# Altium PCB Radar.PcbDoc (part 2 of 3)
Units mil, origin at the board's own origin, x right, y up, seen from the top; angles counter-clockwise.
Board outline 2145 x 1580 mil, 4 copper layers (Layer 1, Layer 2, Layer 3, Layer 4), stack 61.58 mil thick; 62 components, 38 nets, 226 pads, 53 vias.
Unrouted connection lines stored in the file: 17.
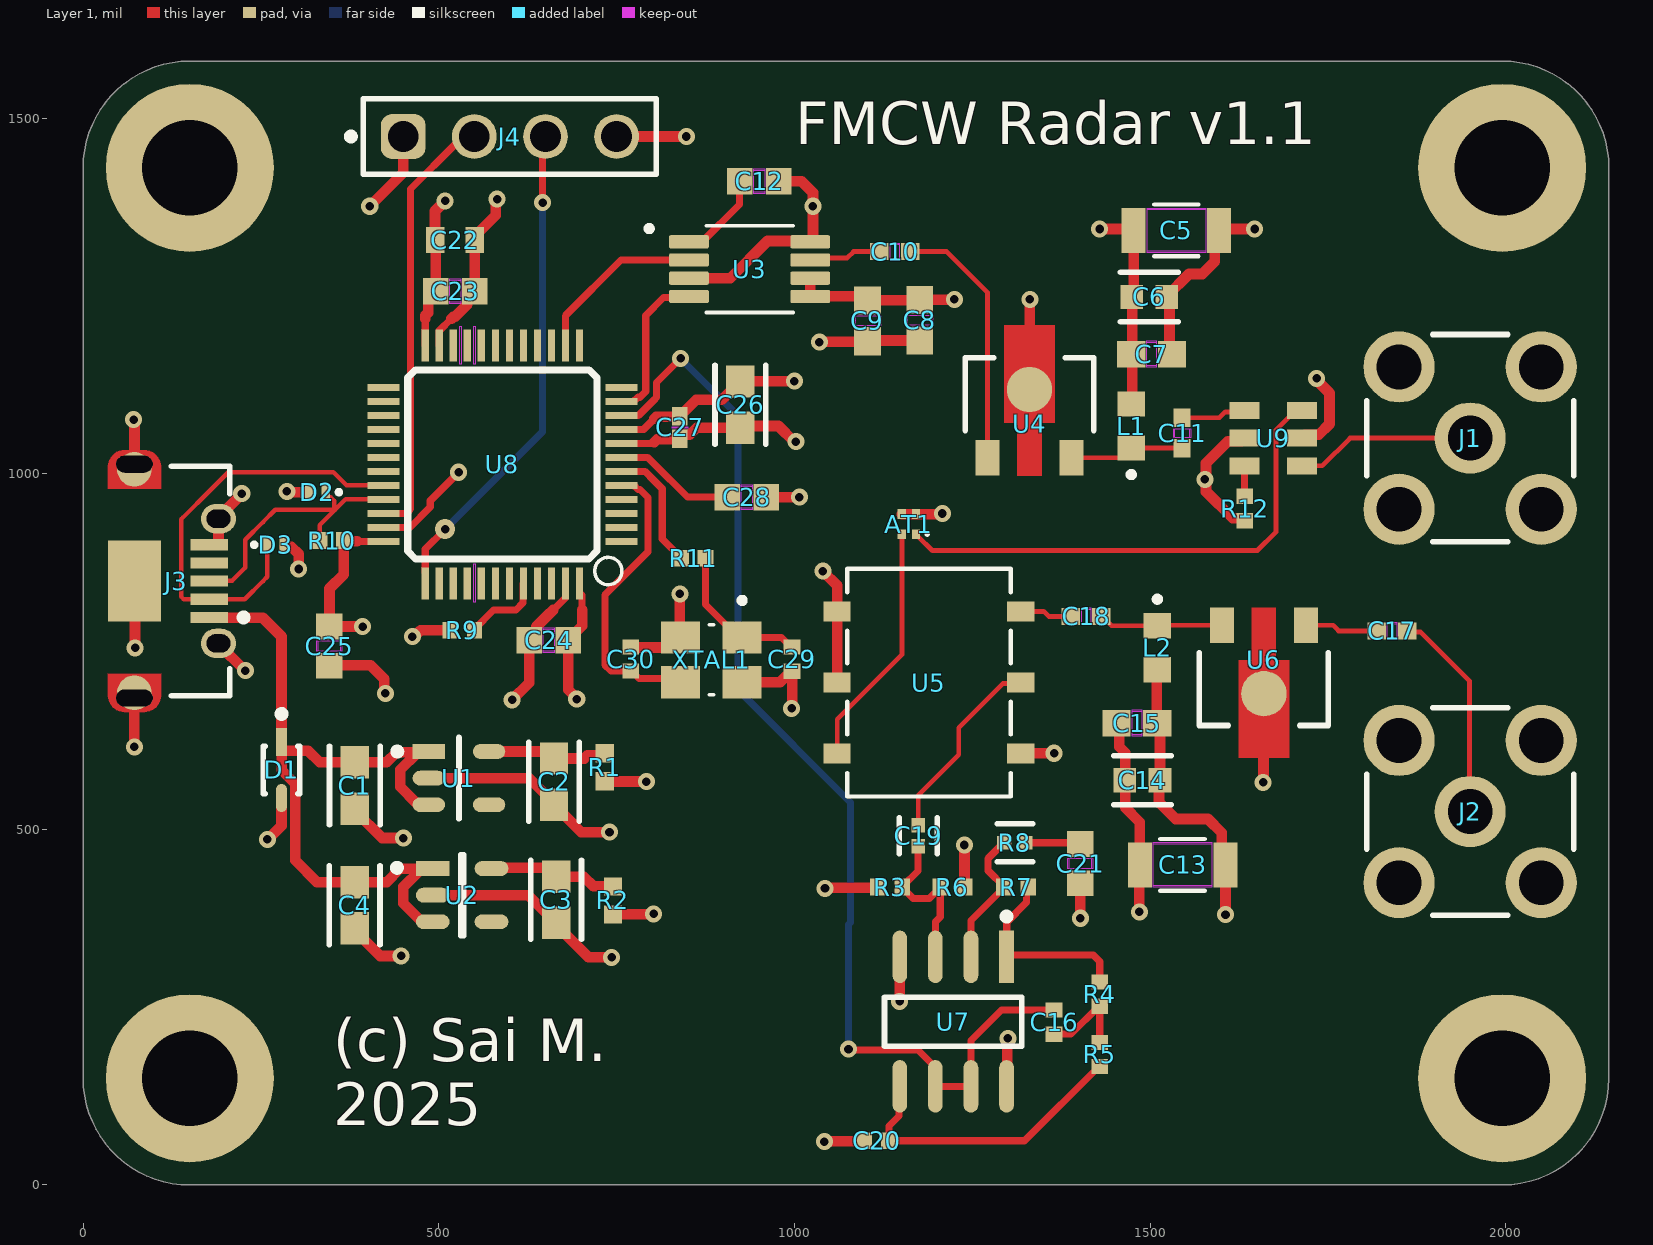
[diagram p0: Layer 1 view]

## Part data (continued)
C22: library part CL10A475KP8NNNC, "Ceramic Capacitor, Multilayer, Ceramic, 10V, 10% +Tol, 10% -Tol, X5R, 15% TC, 4.7uF, Surface Mount, 0603", Capacitor Type=Ceramic, Case/Package=0603, Manufacturer=Samsung, Max Operating Temperature=85°C, Min Operating Temperature=-55°C, Package Shape=Rectangular, Package Style=SMTMeter, Rated DC Voltage (URdc)=10V, Supplier Part Number=1276-1044-1-ND, Temperature Characteristics Code=X5R, Tolerance  (fill in as +-)=10%, Category="Ceramic Capacitors", ComponentLink1Description=https://datasheet.ciiva.com:443/pdfs/VipMasterIC/IC/SEMS/SEMS-S-A0008521003/SEMS-S-A0008520862-1.pdf?src-supplier=IHS+Markit, ComponentLink1URL=https://datasheet.ciiva.com:443/pdfs/VipMasterIC/IC/SEMS/SEMS-S-A0008521003/SEMS-S-A0008520862-1.pdf?src-supplier=IHS+Markit, ComponentLink2Description=https://datasheet.ciiva.com/25797/cl10a475kp8nnnc-25797520.pdf?src-supplier=Digikey, ComponentLink2URL=https://datasheet.ciiva.com/25797/cl10a475kp8nnnc-25797520.pdf?src-supplier=Digikey, ComponentLink3Description=https://datasheet.ciiva.com/26838/getdatasheetpartid-358676-26838384.pdf?src-supplier=Verical, ComponentLink3URL=https://datasheet.ciiva.com/26838/getdatasheetpartid-358676-26838384.pdf?src-supplier=Verical, ComponentLink4Description=https://datasheet.ciiva.com/16318/cl05b104kq5nnnc-16318245.pdf?src-supplier=Future+Electronics, ComponentLink4URL=https://datasheet.ciiva.com/16318/cl05b104kq5nnnc-16318245.pdf?src-supplier=Future+Electronics, Dielectric Material=Ceramic, Height=0.5mm, JESD-609 Code=e3, Length=1.6mm, Manufacturer Part Number=CL10A475KP8NNNC, Mounting Technology="Surface Mount", Multilayer=Yes, Packaging="Tape and Reel", Pins=2, Pricing="1=0.08, 10=0.01, 100=0.008, 1000=0.0064 (USD)", Reach SVHC Compliant=Yes, RoHS=Yes, RoHS Compliant=Yes, Stock=5168989, Supplier=Digikey, Terminal Finish=Nickel, Termination=Wraparound, Tolerance (fill in as +-)=10%, Width=0.8mm
C27: library part C0402C103K5RACTU, "Ceramic Capacitor, Multilayer, Ceramic, 50V, 10% +Tol, 10% -Tol, X7R, 15% TC, 0.01uF, Surface Mount, 0402", Capacitor Type=Ceramic, Case/Package=0402, Manufacturer=KEMET, Max Operating Temperature=125°C, Min Operating Temperature=-55°C, Package Shape=Rectangular, Package Style=SMTMeter, Rated DC Voltage (URdc)=50V, Supplier Part Number=399-C0402C103K5RACTUDKR-ND, Temperature Characteristics Code=X7R, Tolerance  (fill in as +-)=10%, Category="Ceramic Capacitors", ComponentLink1Description=https://datasheet.ciiva.com:443/pdfs/VipMasterIC/IC/KEME/KEME-S-A0008991654/KEME-S-A0008991654-1.pdf?src-supplier=IHS+Markit, ComponentLink1URL=https://datasheet.ciiva.com:443/pdfs/VipMasterIC/IC/KEME/KEME-S-A0008991654/KEME-S-A0008991654-1.pdf?src-supplier=IHS+Markit, ComponentLink2Description=https://datasheet.ciiva.com/45846/docfinderpartnumberc0402c102k5ractu-45846918.pdf?src-supplier=Onlinecomponents.com, ComponentLink2URL=https://datasheet.ciiva.com/45846/docfinderpartnumberc0402c102k5ractu-45846918.pdf?src-supplier=Onlinecomponents.com, Dielectric Material=Ceramic, Height=0.5mm, JESD-609 Code=e3, Length=1mm, Manufacturer Part Number=C0402C103K5RACTU, Mounting Technology="Surface Mount", Multilayer=Yes, Packaging="Tape and Reel", Pins=2, Pricing="1=0.08, 10=0.005, 100=0.0043 (USD)", Reach SVHC Compliant=Yes, RoHS=Yes, RoHS Compliant=Yes, Stock=862179, Supplier=Digikey, Terminal Finish=Nickel, Termination=Wraparound, Tolerance (fill in as +-)=10%, Width=0.5mm
C29 C30: library part GJM1555C1H8R0BB01D, "Ceramic Capacitor, Multilayer, Ceramic, 50V, 1.25% +Tol, 1.25% -Tol, C0G, 30ppm/Cel TC, 0.000008uF, Surface Mount, 0402", Capacitor Type=Ceramic, Case/Package=0402, Manufacturer=Murata, Max Operating Temperature=125°C, Min Operating Temperature=-55°C, Package Shape=Rectangular, Package Style=SMTMeter, Rated DC Voltage (URdc)=50V, Supplier Part Number=490-11238-1-ND, Temperature Characteristics Code=C0G, Tolerance  (fill in as +-)=1.25%, Category="Ceramic Capacitors", ComponentLink1Description=https://datasheet.ciiva.com:443/pdfs/VipMasterIC/IC/MURE/MURE-S-A0004378008/MURE-S-A0004383112-1.pdf?src-supplier=IHS+Markit, ComponentLink1URL=https://datasheet.ciiva.com:443/pdfs/VipMasterIC/IC/MURE/MURE-S-A0004378008/MURE-S-A0004383112-1.pdf?src-supplier=IHS+Markit, ComponentLink2Description=https://datasheet.ciiva.com/11610/product-11610188.pdf?src-supplier=Avnet, ComponentLink2URL=https://datasheet.ciiva.com/11610/product-11610188.pdf?src-supplier=Avnet, Dielectric Material=Ceramic, Height=0.5mm, JESD-609 Code=e3, Length=1mm, Manufacturer Part Number=GJM1555C1H8R0BB01D, Mounting Technology="Surface Mount", Multilayer=Yes, Packaging="Tape and Reel", Pins=2, Pricing="1=0.1, 10=0.052, 100=0.0307, 1000=0.01991 (USD)", Reach SVHC Compliant=Yes, RoHS=Yes, RoHS Compliant=Yes, Stock=33111, Supplier=Digikey, Terminal Finish=Nickel, Termination=Wraparound, Tolerance (fill in as +-)=1.25%, Width=0.5mm
D1: "Trans Voltage Suppressor Diode, 130W, 5V V(RWM), Bidirectional, 2 Element, Silicon", Breakdown Voltage-Nom=7.5V, Clamping Voltage-Max=14V, Manufacturer="Diodes Zetex", Max Breakdown Voltage=9.5V, Max Operating Temperature=150°C, Max Power Dissipation=200mW, Min Breakdown Voltage=5.5V, Min Operating Temperature=-65°C, Non-rep Peak Rev Power Dis-Max=130W, Package Body Material=Plastic, Package Shape=Rectangular, Package Style="SMALL OUTLINEMeter", Peak Reflow Temperature (Cel)=260°C, Rep Pk Reverse Voltage-Max=5V, Supplier Part Number=DESD5V0S1BA-7DICT-ND, Time @ Peak Reflow Temperature-Max (s)=40s, Category="TVS Diodes", ComponentLink1Description=https://datasheet.ciiva.com:443/pdfs/VipMasterIC/IC/DIOD/DIODS15480/DIODS15480-1.pdf?src-supplier=IHS+Markit, ComponentLink1URL=https://datasheet.ciiva.com:443/pdfs/VipMasterIC/IC/DIOD/DIODS15480/DIODS15480-1.pdf?src-supplier=IHS+Markit, ComponentLink2Description=https://datasheet.ciiva.com/6574/ds31275-6574481.pdf?src-supplier=Digikey, ComponentLink2URL=https://datasheet.ciiva.com/6574/ds31275-6574481.pdf?src-supplier=Digikey, ComponentLink3Description=https://datasheet.ciiva.com/13078/ds31275-219185-13078529.pdf?src-supplier=Mouser, ComponentLink3URL=https://datasheet.ciiva.com/13078/ds31275-219185-13078529.pdf?src-supplier=Mouser, ComponentLink4Description=https://datasheet.ciiva.com/30478/0900766b8115c371-30478883.pdf?src-supplier=Rs, ComponentLink4URL=https://datasheet.ciiva.com/30478/0900766b8115c371-30478883.pdf?src-supplier=Rs, ComponentLink5Description=https://datasheet.ciiva.com/15186/getdatasheetpartid-662239-15186712.pdf?src-supplier=Verical, ComponentLink5URL=https://datasheet.ciiva.com/15186/getdatasheetpartid-662239-15186712.pdf?src-supplier=Verical, Diode Element Material=SILICON, Diode Type="TRANS VOLTAGE SUPPRESSOR", JESD-30 Code=R-PDSO-G2, JESD-609 Code=e3, Manufacturer Part Number=DESD5V0S1BA-7, Moisture Sensitivity Level=1, Number of Elements=2, Pins=2, Polarity=Bidirectional, Pricing="1=0.1, 10=0.066, 100=0.05 (USD)", Reach SVHC Compliant=Yes, Reference Standard=IEC-61000-4-5, RoHS=Yes, RoHS Compliant=Yes, Stock=799643, Supplier=Digikey, Surface Mount=Yes, Technology=AVALANCHE, Terminal Finish=Tin, Terminal Form="Gull Wing", Terminal Position=DUAL
D2 D3: "Trans Voltage Suppressor Diode, 35W, 3.3V V(RWM), Bidirectional, 1 Element, Silicon", Manufacturer=Diodes, Supplier Part Number=31-DESD3V3E1BL-7BCT-ND, Category="TVS Diodes", ComponentLink1Description=https://datasheet.ciiva.com:443/pdfs/VipMasterIC/IC/DIOD/DIOD-S-A0007810551/DIOD-S-A0007810551-1.pdf?src-supplier=IHS+Markit, ComponentLink1URL=https://datasheet.ciiva.com:443/pdfs/VipMasterIC/IC/DIOD/DIOD-S-A0007810551/DIOD-S-A0007810551-1.pdf?src-supplier=IHS+Markit, ComponentLink2Description=https://datasheet.octopart.com/DESD3V3E1BL-7B-Diodes-Inc.-datasheet-151210080.pdf?src-supplier=Farnell, ComponentLink2URL=https://datasheet.octopart.com/DESD3V3E1BL-7B-Diodes-Inc.-datasheet-151210080.pdf?src-supplier=Farnell, ComponentLink3Description=https://datasheet.octopart.com/DESD3V3E1BL-7B-Diodes-Inc.-datasheet-151210080.pdf?src-supplier=Newark, ComponentLink3URL=https://datasheet.octopart.com/DESD3V3E1BL-7B-Diodes-Inc.-datasheet-151210080.pdf?src-supplier=Newark, ComponentLink4Description=https://www.diodes.com/assets/Datasheets/DESD3V3E1BL.pdf?src-supplier=Digikey, ComponentLink4URL=https://www.diodes.com/assets/Datasheets/DESD3V3E1BL.pdf?src-supplier=Digikey, Manufacturer Part Number=DESD3V3E1BL-7B, Pricing="1=0.12, 10=0.083, 100=0.034, 500=0.033, 1000=0.031, 2000=0.0305, 5000=0.03 (USD)", RoHS=Yes, Stock=131192, Supplier=Digikey
J1 J2: "RF SMA Connector", Manufacturer=Linx, Supplier Part Number=CONREVSMA002-ND, Category="RF / Coaxial Connectors", ComponentLink1Description=https://datasheet.ciiva.com:443/pdfs/VipMasterIC/IC/LNNC/LNNC-S-A0004850234/LNNC-S-A0004850234-1.pdf?src-supplier=IHS+Markit, ComponentLink1URL=https://datasheet.ciiva.com:443/pdfs/VipMasterIC/IC/LNNC/LNNC-S-A0004850234/LNNC-S-A0004850234-1.pdf?src-supplier=IHS+Markit, ComponentLink2Description=https://datasheet.ciiva.com/644/conrevsma002-644109.pdf?src-supplier=Digikey, ComponentLink2URL=https://datasheet.ciiva.com/644/conrevsma002-644109.pdf?src-supplier=Digikey, ComponentLink3Description=https://datasheet.ciiva.com/16225/conrevsma002-16225213.pdf?src-supplier=Future+Electronics, ComponentLink3URL=https://datasheet.ciiva.com/16225/conrevsma002-16225213.pdf?src-supplier=Future+Electronics, Connector Type=SMA, Manufacturer Part Number=CONREVSMA002, Pricing="1=2.78, 250=2.58, 500=2.41002, 1000=2.2625 (USD)", Reach SVHC Compliant=Yes, RoHS=Yes, RoHS Compliant=Yes, Stock=5396, Supplier=Digikey
J3: library part 47590-0001, "USB Connector, 5 Contact(s), Female, Right Angle, Surface Mount Terminal, Locking, Receptacle", Contact Resistance=30mR, Dielectric Withstanding Voltage (AC)=141V, Insulation Resistance=1GR, Manufacturer=Molex, Max Operating Temperature=85°C, Min Operating Temperature=-30°C, Rated Current (Signal)=1A, Supplier Part Number=WM17144TR-ND, Additional Feature=Shielded, Board Mounting Option=PEG, Body Breadth=0.118inch, Body Depth=0.232inch, Body Length=0.295inch, Body/Shell Style=RECEPTACLE, Category="USB Connectors", ComponentLink1Description=https://datasheet.ciiva.com:443/pdfs/VipMasterIC/IC/MOLE/MOLE-S-A0000442751/MOLE-S-A0000443003-1.pdf?src-supplier=IHS+Markit, ComponentLink1URL=https://datasheet.ciiva.com:443/pdfs/VipMasterIC/IC/MOLE/MOLE-S-A0000442751/MOLE-S-A0000443003-1.pdf?src-supplier=IHS+Markit, ComponentLink2Description=https://datasheet.ciiva.com/11731/0900766b80dfe0a6-11731294.pdf?src-supplier=Rs, ComponentLink2URL=https://datasheet.ciiva.com/11731/0900766b80dfe0a6-11731294.pdf?src-supplier=Rs, ComponentLink3Description=https://datasheet.ciiva.com/1098/1597781-1098479.pdf?src-supplier=Element14, ComponentLink3URL=https://datasheet.ciiva.com/1098/1597781-1098479.pdf?src-supplier=Element14, ComponentLink4Description=https://datasheet.ciiva.com/30249/0475900001-io-connectors-30249603.pdf?src-supplier=Onlinecomponents.com, ComponentLink4URL=https://datasheet.ciiva.com/30249/0475900001-io-connectors-30249603.pdf?src-supplier=Onlinecomponents.com, ComponentLink5Description=https://datasheet.ciiva.com/26930/getdatasheetpartid-760223-26930053.pdf?src-supplier=Verical, ComponentLink5URL=https://datasheet.ciiva.com/26930/getdatasheetpartid-760223-26930053.pdf?src-supplier=Verical, ComponentLink6Description=https://datasheet.ciiva.com/16148/0475900001-io-connectors-16148922.pdf?src-supplier=Onlinecomponents.com, ComponentLink6URL=https://datasheet.ciiva.com/16148/0475900001-io-connectors-16148922.pdf?src-supplier=Onlinecomponents.com, Connector Type="TELECOM AND DATACOM CONNECTOR", Contact Finish - Mating=GOLD, Contact Finish - Termination="Gold (Au)", Contact Gender=Female, Contact Material="Copper Alloy", DIN Conformance=No, Durability=10000Cycles, Empty Shell=No, Filter Feature=No, IEC Conformance=No, Insulation Material=Polymer, JESD-609 Code=e4, Manufacturer Part Number=47590-0001, MIL Conformance=No, Mixed Contacts=No, Mounting Option 1=LOCKING, Mounting Style="RIGHT ANGLE", Mounting Technology=Cable, Number Of Connectors=1, Number of Contacts=5, Number Of PCB Rows=1, Option="General Purpose", PCB Contact Pattern=RECTANGULAR, Polarization Key="POLAR PIN POSITION", Pricing="1500=0.44663, 3000=0.42531, 4500=0.41332, 7500=0.39869, 10500=0.38935, 15000=0.37968 (USD)", Reach SVHC Compliant=Yes, Reference Standard=UL, Reliability=COMMERCIAL, RoHS=Yes, RoHS Compliant=Yes, Shell Finish=Tin, Shell Material="Stainless Steel", Stock=34500, Supplier=Digikey, Terminal Pitch=0.6604mm, Termination=SMD/SMT
J4: library part 61300411121, "Board Connector, 4 Contact(s), 1 Row(s), Male, Straight, 0.1 inch Pitch, Solder Terminal, Locking, Black Insulator, Plug", Contact Resistance=20mR, Dielectric Withstanding Voltage (AC)=500V, Insulation Color=Black, Insulation Resistance=1GR, Manufacturer="Wurth Electronics", Max Operating Temperature=125°C, Min Operating Temperature=-40°C, Rated Current (Signal)=3A, Supplier Part Number=732-5317-ND, Body Breadth=0.1inch, Body Depth=0.1inch, Body Length=0.4inch, Body/Shell Style=PLUG, Category="Headers and Wire Housings", ComponentLink1Description=https://datasheet.ciiva.com:443/pdfs/VipMasterIC/IC/MIDC/MIDCS07676/MIDCS07676-1.pdf?src-supplier=IHS+Markit, ComponentLink1URL=https://datasheet.ciiva.com:443/pdfs/VipMasterIC/IC/MIDC/MIDCS07676/MIDCS07676-1.pdf?src-supplier=IHS+Markit, ComponentLink2Description=https://datasheet.octopart.com/61300411121-W%C3%BCrth-Elektronik-datasheet-21154836.pdf?src-supplier=Element14, ComponentLink2URL=https://datasheet.octopart.com/61300411121-W%C3%BCrth-Elektronik-datasheet-21154836.pdf?src-supplier=Element14, ComponentLink3Description=http://www.farnell.com/cad/1737268.pdf?src-supplier=Element14, ComponentLink3URL=http://www.farnell.com/cad/1737268.pdf?src-supplier=Element14, ComponentLink4Description=https://katalog.we-online.de/em/datasheet/6130xx11121.pdf?src-supplier=Digikey, ComponentLink4URL=https://katalog.we-online.de/em/datasheet/6130xx11121.pdf?src-supplier=Digikey, Connector Type="BOARD CONNECTOR", Contact Finish - Mating=GOLD, Contact Finish - Termination="Gold (Au) - with Nickel (Ni) barrier", Contact Gender=Male, Contact Material="Copper Alloy", Contact Pattern=RECTANGULAR, Contact Style="SQ PIN-SKT", Insulation Material=Polybutylene, JESD-609 Code=e4, Manufacturer Part Number=61300411121, Mating Contact Pitch=0.1inch, Mounting Option 1=LOCKING, Mounting Style=STRAIGHT, Mounting Technology=Board, Number Of Connectors=1, Number of Contacts=4, Number of Rows Loaded=1, PCB Contact Pattern=RECTANGULAR, Pricing="1=0.17, 10=0.147, 25=0.1216, 50=0.1018, 100=0.0918, 1000=0.085 (USD)", Reach SVHC Compliant=Yes, Reference Standard=UL, Reliability=COMMERCIAL, RoHS=Yes, RoHS Compliant=Yes, Stock=73347, Supplier=Digikey, Terminal Length=0.118inch, Terminal Pitch=2.54mm, Termination=Solder
L1: library part LQG18HNR10J00D, "General Purpose Inductor, 0.1uH, 5%, 1 Element, Air-Core, SMD, 0603", Case/Size Code=0603, DC Resistance (DCR)=900mR, Inductance-Nom (L)=0.1uH, Inductor Application="RF INDUCTOR", Inductor Type="GENERAL PURPOSE INDUCTOR", Manufacturer=Murata, Max Current Rating=350mA, Max Operating Temperature=85°C, Min Operating Temperature=-40°C, Package Height=0.8mm, Package Length=1.6mm, Package Style=SMTMeter, Self Resonant Frequency=800MHz, Supplier Part Number=490-6586-1-ND, Test Frequency=100MHz, Tolerance=5%, Category="Fixed Inductors", Channels=1, ComponentLink1Description=https://datasheet.ciiva.com:443/pdfs/VipMasterIC/IC/MURE/MURE-S-A0008911298/MURE-S-A0008911379-1.pdf?src-supplier=IHS+Markit, ComponentLink1URL=https://datasheet.ciiva.com:443/pdfs/VipMasterIC/IC/MURE/MURE-S-A0008911298/MURE-S-A0008911379-1.pdf?src-supplier=IHS+Markit, ComponentLink2Description=https://datasheet.ciiva.com/11801/0900766b80f1087c-11801431.pdf?src-supplier=Rs, ComponentLink2URL=https://datasheet.ciiva.com/11801/0900766b80f1087c-11801431.pdf?src-supplier=Rs, ComponentLink3Description=https://datasheet.ciiva.com/6710/l0075s0083lqg18h-6710060.pdf?src-supplier=Digikey, ComponentLink3URL=https://datasheet.ciiva.com/6710/l0075s0083lqg18h-6710060.pdf?src-supplier=Digikey, ComponentLink4Description=https://datasheet.ciiva.com/6710/l0075s0083lqg18h-6710062.pdf?src-supplier=Digikey, ComponentLink4URL=https://datasheet.ciiva.com/6710/l0075s0083lqg18h-6710062.pdf?src-supplier=Digikey, ComponentLink5Description=https://datasheet.ciiva.com/8002/5102-8002605.pdf?src-supplier=Element14, ComponentLink5URL=https://datasheet.ciiva.com/8002/5102-8002605.pdf?src-supplier=Element14, ComponentLink6Description=https://datasheet.ciiva.com/8002/5102-8002606.pdf?src-supplier=Element14, ComponentLink6URL=https://datasheet.ciiva.com/8002/5102-8002606.pdf?src-supplier=Element14, Construction="Multilayer Chip", Core Material=Air, JESD-609 Code=e3, Manufacturer Part Number=LQG18HNR10J00D, Package Width=0.8mm, Packaging="Tape and Reel", Pins=2, Pricing="1=0.18, 10=0.144, 50=0.144, 100=0.119, 1000=0.098, 10000=0.066 (USD)", Quality Factor-Min (at L-nom)=12, Reach SVHC Compliant=Yes, RoHS=Yes, RoHS Compliant=Yes, Shape/Size Description="RECTANGULAR PACKAGE", Shielding=Unshielded, Stock=24486, Supplier=Digikey, Surface Mount=Yes, Terminal Finish=Tin, Terminal Placement="Dual Ended", Termination=Wraparound
L2: library part LQG18HNR10J00D, "General Purpose Inductor, 0.1uH, 5%, 1 Element, Air-Core, SMD, 0603", Case/Size Code=0603, DC Resistance (DCR)=900mR, Inductance-Nom (L)=0.1uH, Inductor Application="RF INDUCTOR", Inductor Type="GENERAL PURPOSE INDUCTOR", Manufacturer=Murata, Max Current Rating=350mA, Max Operating Temperature=85°C, Min Operating Temperature=-40°C, Package Height=0.8mm, Package Length=1.6mm, Package Style=SMTMeter, Self Resonant Frequency=800MHz, Supplier Part Number=81-LQG18HNR10J00D, Test Frequency=100MHz, Tolerance=5%, Category="Fixed Inductors", Channels=1, ComponentLink1Description=https://datasheet.ciiva.com:443/pdfs/VipMasterIC/IC/MURE/MURE-S-A0008911298/MURE-S-A0008911379-1.pdf?src-supplier=IHS+Markit, ComponentLink1URL=https://datasheet.ciiva.com:443/pdfs/VipMasterIC/IC/MURE/MURE-S-A0008911298/MURE-S-A0008911379-1.pdf?src-supplier=IHS+Markit, ComponentLink2Description=https://datasheet.ciiva.com/11801/0900766b80f1087c-11801431.pdf?src-supplier=Rs, ComponentLink2URL=https://datasheet.ciiva.com/11801/0900766b80f1087c-11801431.pdf?src-supplier=Rs, ComponentLink3Description=https://datasheet.ciiva.com/6710/l0075s0083lqg18h-6710060.pdf?src-supplier=Digikey, ComponentLink3URL=https://datasheet.ciiva.com/6710/l0075s0083lqg18h-6710060.pdf?src-supplier=Digikey, ComponentLink4Description=https://datasheet.ciiva.com/6710/l0075s0083lqg18h-6710062.pdf?src-supplier=Digikey, ComponentLink4URL=https://datasheet.ciiva.com/6710/l0075s0083lqg18h-6710062.pdf?src-supplier=Digikey, ComponentLink5Description=https://datasheet.ciiva.com/8002/5102-8002605.pdf?src-supplier=Element14, ComponentLink5URL=https://datasheet.ciiva.com/8002/5102-8002605.pdf?src-supplier=Element14, ComponentLink6Description=https://datasheet.ciiva.com/8002/5102-8002606.pdf?src-supplier=Element14, ComponentLink6URL=https://datasheet.ciiva.com/8002/5102-8002606.pdf?src-supplier=Element14, Construction="Multilayer Chip", Core Material=Air, JESD-609 Code=e3, Manufacturer Part Number=LQG18HNR10J00D, Package Width=0.8mm, Packaging="Tape and Reel", Pins=2, Pricing="1=0.18, 10=0.144, 50=0.144, 100=0.119, 1000=0.098, 10000=0.066 (USD)", Quality Factor-Min (at L-nom)=12, Reach SVHC Compliant=Yes, RoHS=Yes, RoHS Compliant=Yes, Shape/Size Description="RECTANGULAR PACKAGE", Shielding=Unshielded, Stock=24486, Supplier=Mouser, Surface Mount=Yes, Terminal Finish=Tin, Terminal Placement="Dual Ended", Termination=Wraparound
R1 R2: library part ERJ-3GEY0R00V, "Fixed Resistor, Metal Glaze/thick Film, 0.1W, 0ohm, Surface Mount, 0603", Case/Package=0603, Manufacturer=Panasonic, Max Operating Temperature=155°C, Min Operating Temperature=-55°C, Package Height=0.45mm, Package Length=1.6mm, Package Shape=Rectangular, Package Width=0.8mm, Power=100mW, Rated Temperature=70°C, Resistor Type="FIXED RESISTOR", Supplier Part Number=P0.0GCT-ND, Category="Chip SMD Resistors", ComponentLink1Description=https://datasheet.ciiva.com:443/pdfs/VipMasterIC/IC/PANA/PANA-S-A0009459603/PANA-S-A0009459603-1.pdf?src-supplier=IHS+Markit, ComponentLink1URL=https://datasheet.ciiva.com:443/pdfs/VipMasterIC/IC/PANA/PANA-S-A0009459603/PANA-S-A0009459603-1.pdf?src-supplier=IHS+Markit, ComponentLink2Description=https://datasheet.ciiva.com/11808/0900766b80f806dd-11808207.pdf?src-supplier=Rs, ComponentLink2URL=https://datasheet.ciiva.com/11808/0900766b80f806dd-11808207.pdf?src-supplier=Rs, ComponentLink3Description=https://datasheet.ciiva.com/27055/1935748-27055113.pdf?src-supplier=Jameco, ComponentLink3URL=https://datasheet.ciiva.com/27055/1935748-27055113.pdf?src-supplier=Jameco, ComponentLink4Description=https://datasheet.ciiva.com/43460/1678796-43460647.pdf?src-supplier=Farnell, ComponentLink4URL=https://datasheet.ciiva.com/43460/1678796-43460647.pdf?src-supplier=Farnell, ComponentLink5Description=https://datasheet.ciiva.com/28695/1678796-28695833.pdf?src-supplier=Element14, ComponentLink5URL=https://datasheet.ciiva.com/28695/1678796-28695833.pdf?src-supplier=Element14, ComponentLink6Description=https://datasheet.ciiva.com/5959/1678796-5959707.pdf?src-supplier=Farnell, ComponentLink6URL=https://datasheet.ciiva.com/5959/1678796-5959707.pdf?src-supplier=Farnell, ComponentLink7Description=https://datasheet.ciiva.com/48532/aoa0000ce1-48532165.pdf?src-supplier=Avnet, ComponentLink7URL=https://datasheet.ciiva.com/48532/aoa0000ce1-48532165.pdf?src-supplier=Avnet, ComponentLink8Description=https://datasheet.ciiva.com/30199/4aoa0000ce1-30199822.pdf?src-supplier=Onlinecomponents.com, ComponentLink8URL=https://datasheet.ciiva.com/30199/4aoa0000ce1-30199822.pdf?src-supplier=Onlinecomponents.com, ComponentLink9Description=https://datasheet.ciiva.com/16834/aoa0000ce1-16834828.pdf?src-supplier=Future+Electronics, ComponentLink9URL=https://datasheet.ciiva.com/16834/aoa0000ce1-16834828.pdf?src-supplier=Future+Electronics, ComponentLink10Description=https://datasheet.ciiva.com/16758/70255313-16758527.pdf?src-supplier=Allied+Electronics, ComponentLink10URL=https://datasheet.ciiva.com/16758/70255313-16758527.pdf?src-supplier=Allied+Electronics, ComponentLink11Description=https://datasheet.ciiva.com/46377/1678796-46377868.pdf?src-supplier=Element14, ComponentLink11URL=https://datasheet.ciiva.com/46377/1678796-46377868.pdf?src-supplier=Element14, ComponentLink12Description=https://datasheet.ciiva.com/9198/aoa0000ce1-9198975.pdf?src-supplier=Avnet, ComponentLink12URL=https://datasheet.ciiva.com/9198/aoa0000ce1-9198975.pdf?src-supplier=Avnet, Construction=Rectangular, JESD-609 Code=e3, Manufacturer Part Number=ERJ-3GEY0R00V, Mounting Technology="Surface Mount", Packaging="Tape and Reel", Pins=2, Pricing="1=0.1, 10=0.02, 25=0.0164, 50=0.0144, 100=0.0126, 250=0.0106, 500=0.00936, 1000=0.0083, 5000=0.0064, 10000=0.00578, 15000=0.00546, 25000=0.0051, 35000=0.00489, 50000=0.00468, 125000=0.00421, 250000=0.00392, 500000=0.00367 (USD)", Reach SVHC Compliant=Yes, Reference Standard=AEC-Q200, RoHS=Yes, RoHS Compliant=Yes, Stock=690397, Supplier=Digikey, Technology="METAL GLAZE/THICK FILM", Terminal Finish=Nickel, Termination=Wraparound